# EAGLE board UVglasses (EAGLE 8.5.2)
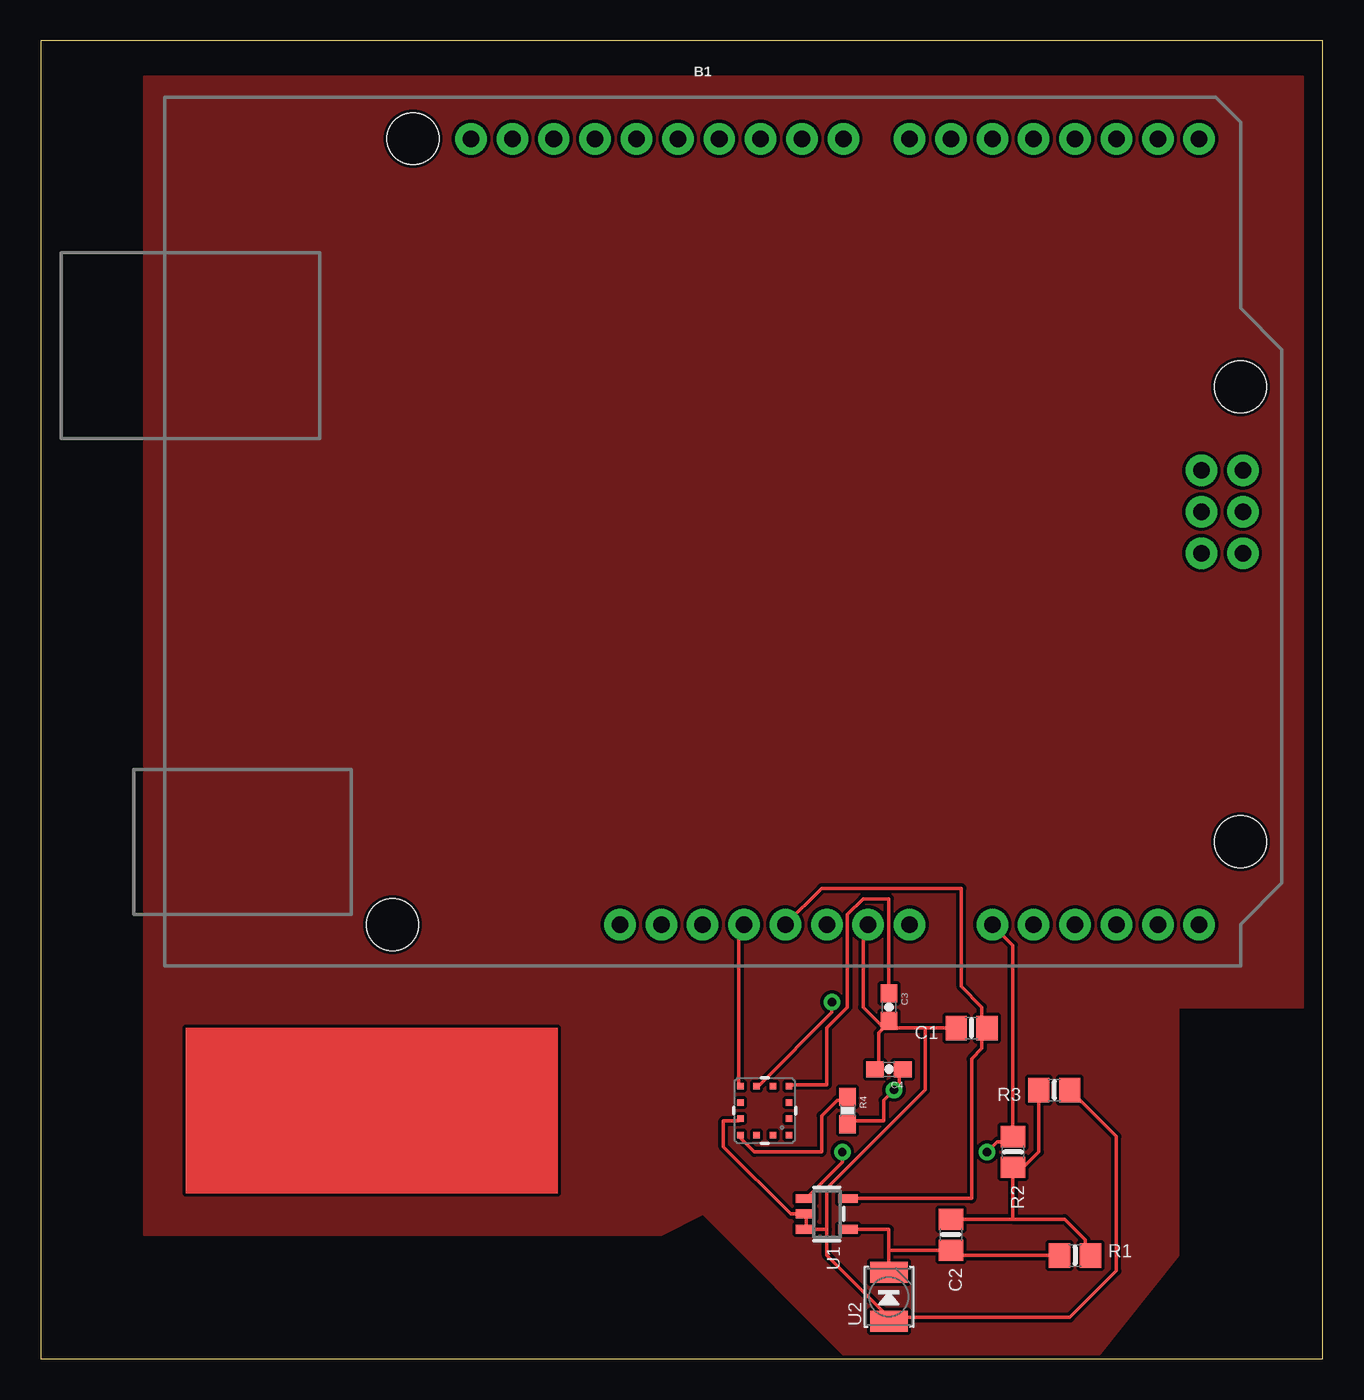
[diagram p0: board, top side]
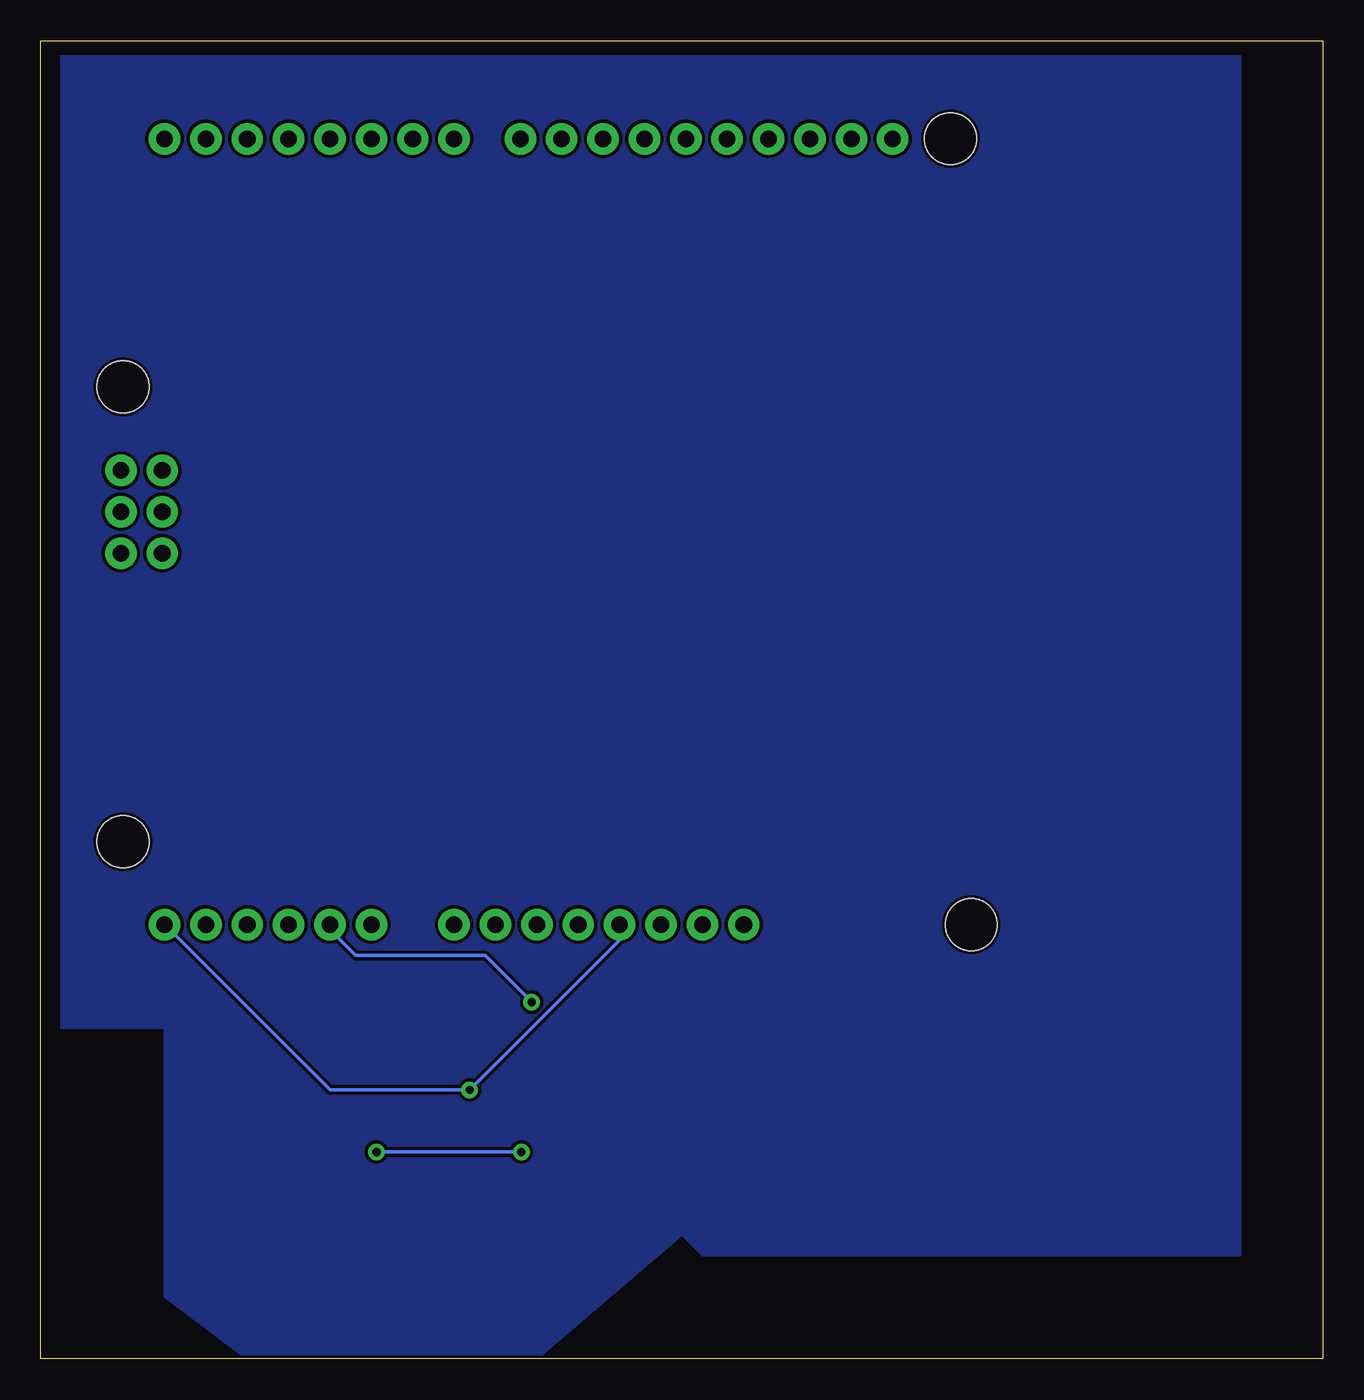
[diagram p1: board, bottom side, seen from below]

Size 78.72 x 80.95 mm. Coordinates in mm from the lower left corner, seen from the top.
Outline: 0,0 78.72,0 78.72,80.95 0,80.95 0,0
Copper layers (1*16): Top 0.035mm / dielectric 1.5mm / Bottom 0.035mm
Design rules "SparkFun": minimum track width 8mil, minimum drill 20mil, track to track 8mil, track to pad 8mil, pad to pad 8mil, via to via 8mil, smd to smd 8mil, copper to edge 8mil, drill to drill 8mil, minimum pad ring 12mil, minimum via ring 10mil, stop-mask expansion 4mil, vias tented up to drill 20mil, thermal gap 10mil

## Footprints (pad centres in the part's own frame; a part is rotated, then mirrored left to right if it is on the bottom)
ARDUINO_R3 = drill 1.016 pad 1.93: 3.3V 2.54,-24.13; 5V 5.08,-24.13; A0 17.78,-24.13; A1 20.32,-24.13; A2 22.86,-24.13; A3 25.4,-24.13; A4 27.94,-24.13; A5 30.48,-24.13; AREF -9.144,24.13; D0 30.48,24.13; D1 27.94,24.13; D2 25.4,24.13; D3 22.86,24.13; D4 20.32,24.13; D5 17.78,24.13; D6 15.24,24.13; D7 12.7,24.13; D8 8.636,24.13; D9 6.096,24.13; D10 3.556,24.13; D11 1.016,24.13; D12 -1.524,24.13; D13 -4.064,24.13; GND@1 7.62,-24.13; GND@2 10.16,-24.13; GND@3 -6.604,24.13; GND@4 33.16,-1.32; IOREF -2.54,-24.13; MISO 30.62,3.76; MOSI 33.16,1.22; NC -5.08,-24.13; RESET@1 0,-24.13; RESET@2 30.62,-1.32; SCK 30.62,1.22; SCL -14.224,24.13; SDA -11.684,24.13; VCC 33.16,3.76; VIN 12.7,-24.13 | hole 3.175: -17.78,24.13; 33.02,8.89; 33.02,-19.05; -19.05,-24.13
0805-NO = smd 1.3 x 1.5: 1 -0.95,0; 2 0.95,0
0603-CAP = smd 1.1 x 1: 1 -0.85,0; 2 0.85,0
0603-RES = smd 1.1 x 1: 1 -0.85,0; 2 0.85,0
SOT23-5 = smd 0.55 x 1.2: 1 -0.95,-1.3; 2 0,-1.3; 3 0.95,-1.3; 4 0.95,1.3; 5 -0.95,1.3
GUVA-S12SD = smd 2.3 x 1.3: A 0,-1.5; K 0,1.5
ML8511 = smd 0.4 x 0.4: 1 -1.5,-1.5; 2 -1.5,-0.5; 3 -1.5,0.5; 4 -1.5,1.5; 5 -0.5,1.5; 6 0.5,1.5; 7 1.5,1.5; 8 1.5,0.5; 9 1.5,-0.5; 10 1.5,-1.5; 11 0.5,-1.5; 12 -0.5,-1.5

## Placement (x,y rotation side)
B1  ARDUINO_UNO_R3  [ARDUINO_R3]  40.64,50.8 0 top
C1  0.1uF  [0805-NO]  57.15,20.32 180 top
C2  0.1uF  [0805-NO]  55.88,7.62 270 top
C3  1nF  [0603-CAP]  52.07,21.59 270 top
C4  0.1uF  [0603-CAP]  52.07,17.78 180 top
R1  1M  [0805-NO]  63.5,6.35 0 top
R2  3.3K  [0805-NO]  59.69,12.7 270 top
R3  1K  [0805-NO]  62.23,16.51 180 top
R4  10K  [0603-RES]  49.53,15.24 270 top
U1  MCP6001  [SOT23-5]  48.26,8.89 270 top
U2  GUVA-S12SD  [GUVA-S12SD]  52.07,3.81 0 top
U3  ML8511-UV-SENSOR  [ML8511]  44.45,15.24 90 top

## Library data of the parts
B1 = SparkFun-Boards
C1 C2 R1-R3 U1 U2 = microbuilder
C3 = SparkFun-Capacitors; PROD_ID: CAP-07886
C4 = SparkFun-Capacitors; PROD_ID: CAP-00810
R4 = SparkFun-Resistors; PROD_ID: RES-00824
U3 = ML8511

## Nets
3.3V: B1.3.3V B1.A5 C4.1 R4.2 U3.7
5.0V: B1.5V C1.1 U1.5
A0: B1.A0 R2.1 U1.1
A1: B1.A1 U3.8
ENABLE: R4.1 U3.4
GND: B1.GND@2 C1.2 C3.2 C4.2 R3.1 U1.2 U1.3 U2.A U3.5
N$1: C2.1 R1.2 R2.2 R3.2
N$2: C2.2 R1.1 U1.4 U2.K
N$3: C3.1 U3.10

## Tracks (layer width: path | path; a pad name or v marks a point on that pad's centre or on a via)
3.3V  (via drill 0.51)
  Top 0.203: R4.2 49.53,14.61 51.75,14.61 51.75,15.88 v52.39,16.51 52.7,16.83 52.7,17.78 C4.1 | B1.3.3V 42.86,26.35 42.86,16.83 U3.7
  Bottom 0.203: B1.3.3V 43.18,25.72 v52.39,16.51 60.96,16.51 B1.A5
5.0V
  Top 0.203: 57.78,20.32 57.78,19.05 57.15,18.41 57.15,9.84 49.85,9.84 U1.5 | B1.5V 47.94,28.89 56.52,28.89 56.52,22.86 57.78,21.59 57.78,20.32 | 57.78,20.32 C1.1
A0  (via drill 0.51)
  Top 0.203: v49.21,12.7 49.21,12.06 46.99,9.84 U1.1 | v58.1,12.7 58.74,13.34 59.69,13.34 R2.1 59.69,25.4 B1.A0
  Bottom 0.203: v58.1,12.7 v49.21,12.7
A1  (via drill 0.51)
  Top 0.203: v48.58,21.91 48.58,21.27 44.13,16.83 U3.8
  Bottom 0.203: v48.58,21.91 51.44,24.77 59.37,24.77 60.96,26.35 B1.A1
ENABLE
  Top 0.203: U3.4 42.86,13.65 43.81,12.7 47.94,12.7 47.94,14.92 48.9,15.88 49.53,15.88 R4.1
GND
  Top 0.203: 51.75,20.32 52.07,20.64 C3.2 51.75,20.32 | 51.75,20.32 51.44,20 51.44,17.78 C4.2 | 51.75,20.32 54.29,20.32 | 54.29,20.32 C1.2 | 51.75,20.32 50.48,21.59 50.48,26.35 B1.GND@2 | U3.5 42.86,14.61 41.91,14.61 41.91,13.02 46.04,8.89 U1.2 46.99,8.89 46.99,7.94 | 52.07,2.54 63.18,2.54 66.04,5.4 66.04,13.65 R3.1 | 48.26,7.94 46.99,7.94 | 48.26,7.94 48.26,6.35 52.07,2.54 | 46.99,7.94 U1.3 | 52.07,2.54 U2.A | 54.29,20.32 54.29,16.51 48.26,10.48 48.26,7.94
N$1
  Top 0.203: 59.69,8.57 C2.1 | 59.69,11.11 R2.2 | 59.69,11.11 59.69,8.57 | 59.69,8.57 62.87,8.57 64.14,7.3 64.14,6.35 R1.2 | 59.69,11.11 61.28,12.7 R3.2
N$2
  Top 0.203: U2.K 52.07,6.67 | 52.07,6.67 52.07,7.94 49.85,7.94 U1.4 | 52.07,6.67 C2.2 | R1.1 55.88,6.35 C2.2 | C2.2
N$3
  Top 0.203: C3.1 52.07,28.26 50.48,28.26 49.53,27.3 49.53,21.59 48.26,20.32 48.26,16.83 46.04,16.83 U3.10
N$4
  pour Top: 6.35,78.74 6.35,7.62 38.1,7.62 40.64,8.89 49.53,0 64.77,0 69.85,6.35 69.85,21.59 77.47,21.59 77.47,78.74
N$5
  pour Bottom: 5.08,80.01 5.08,6.35 38.1,6.35 39.37,7.62 48.26,0 66.04,0 71.12,3.81 71.12,20.32 77.47,20.32 77.47,80.01
(copper drawn outside any net)
  shapes: Top area x1